# Altium PCB RX-Module-PCB.PcbDoc
Units mil, origin at the board's own origin, x right, y up, seen from the top; angles counter-clockwise.
Board outline 3503.94 x 2440.94 mil, 2 copper layers (Top Layer, Bottom Layer); 27 components, 37 nets, 107 pads, 17 vias.
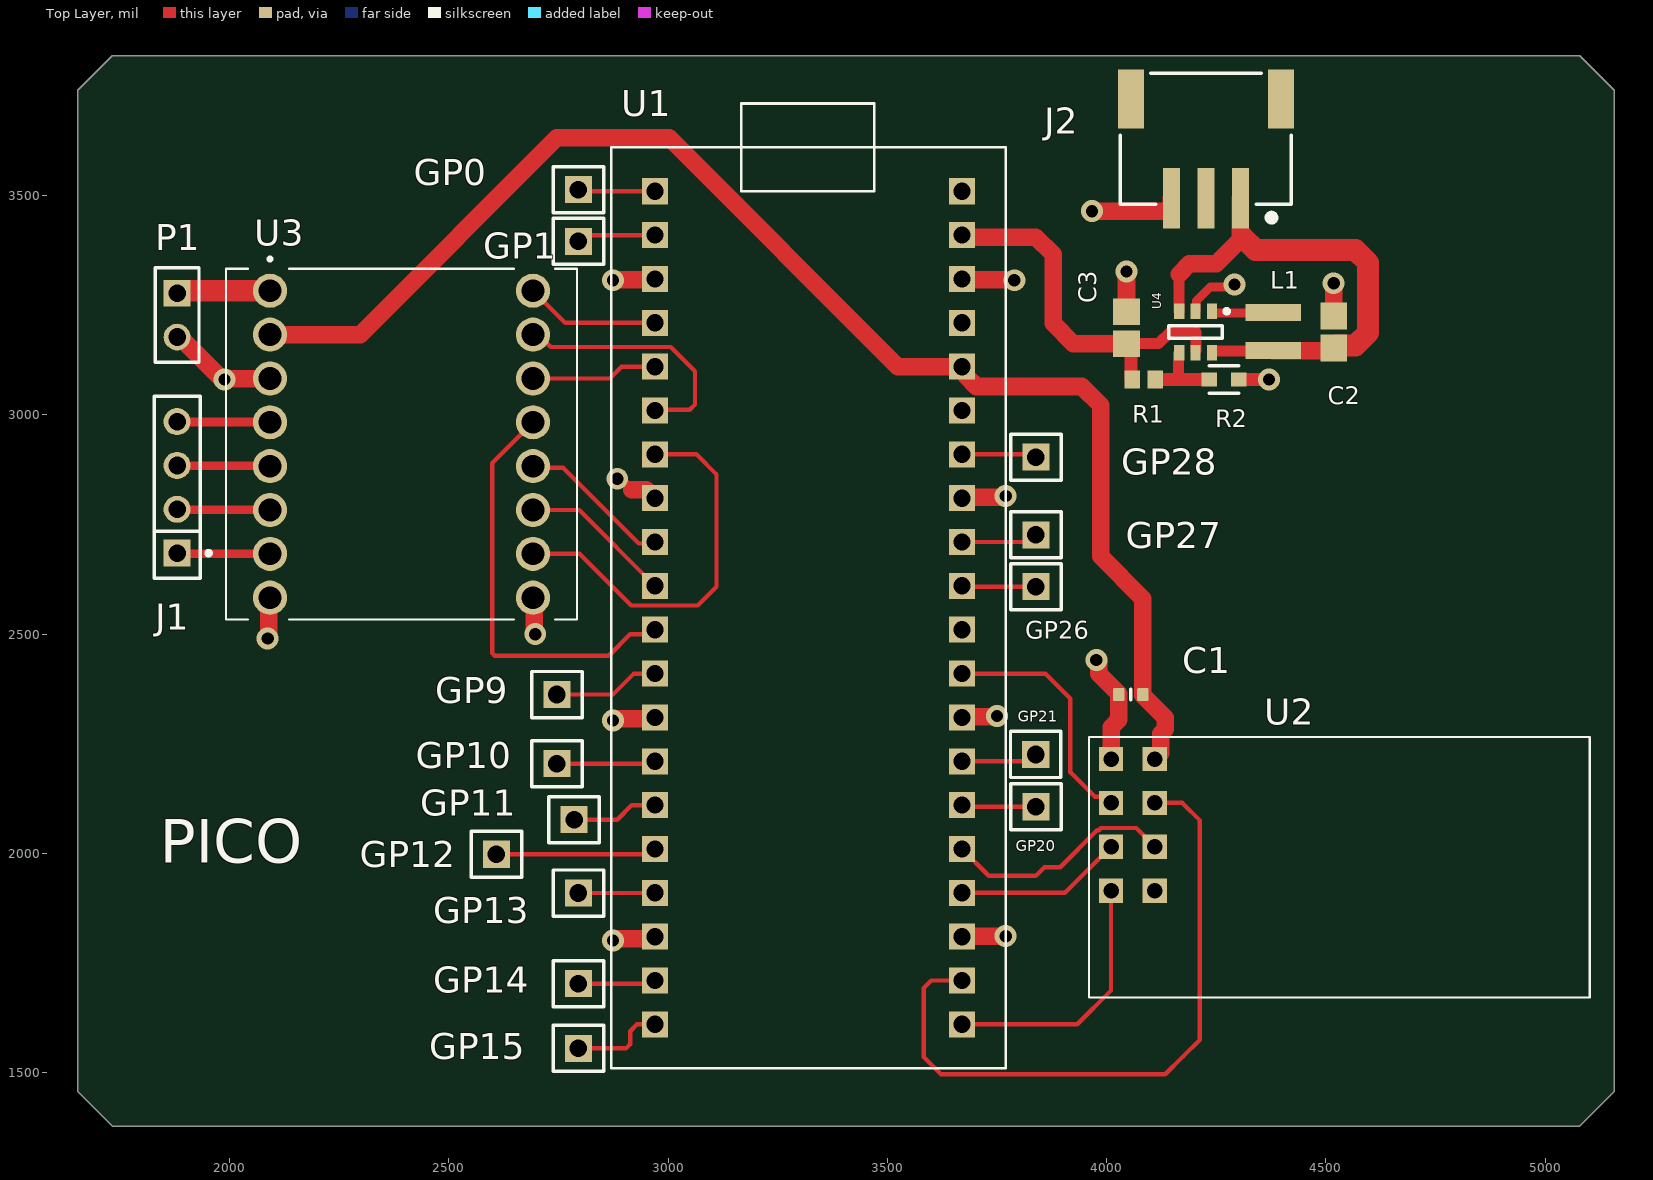
[diagram p0: Top Layer view]
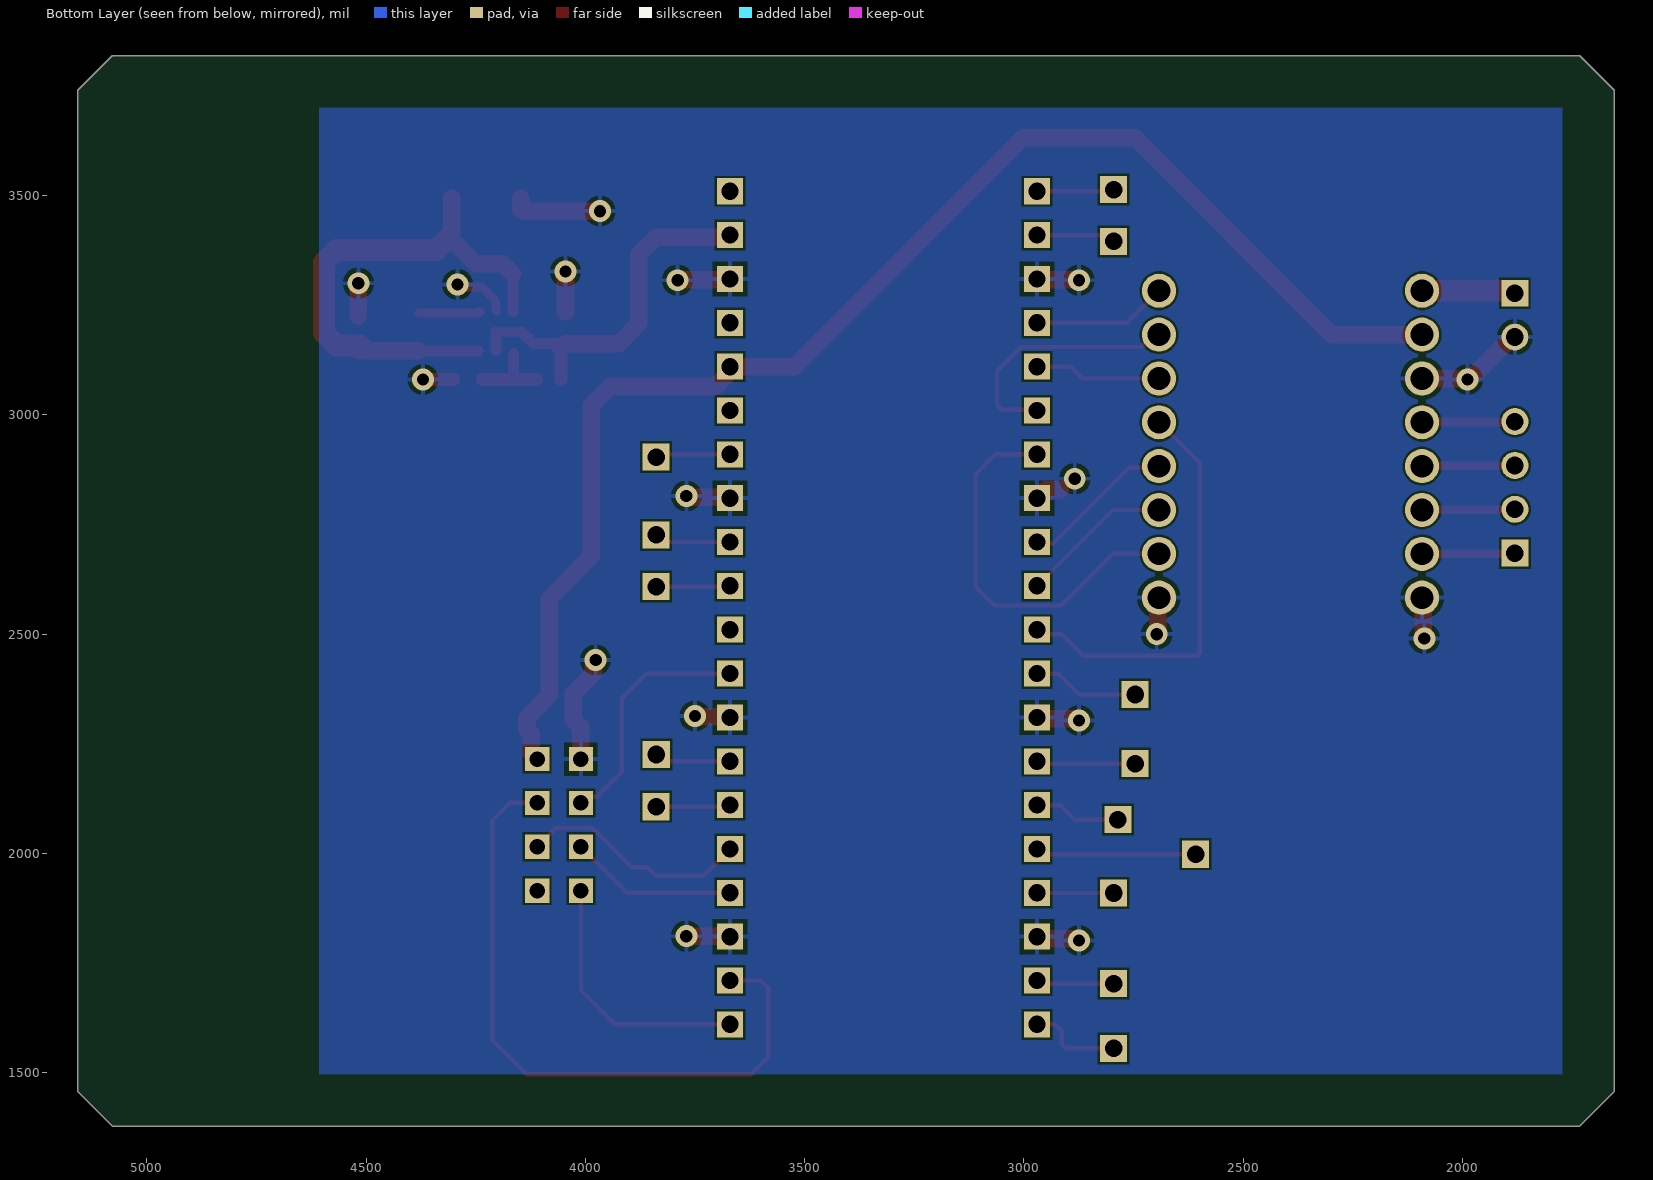
[diagram p1: Bottom Layer view, seen from below]
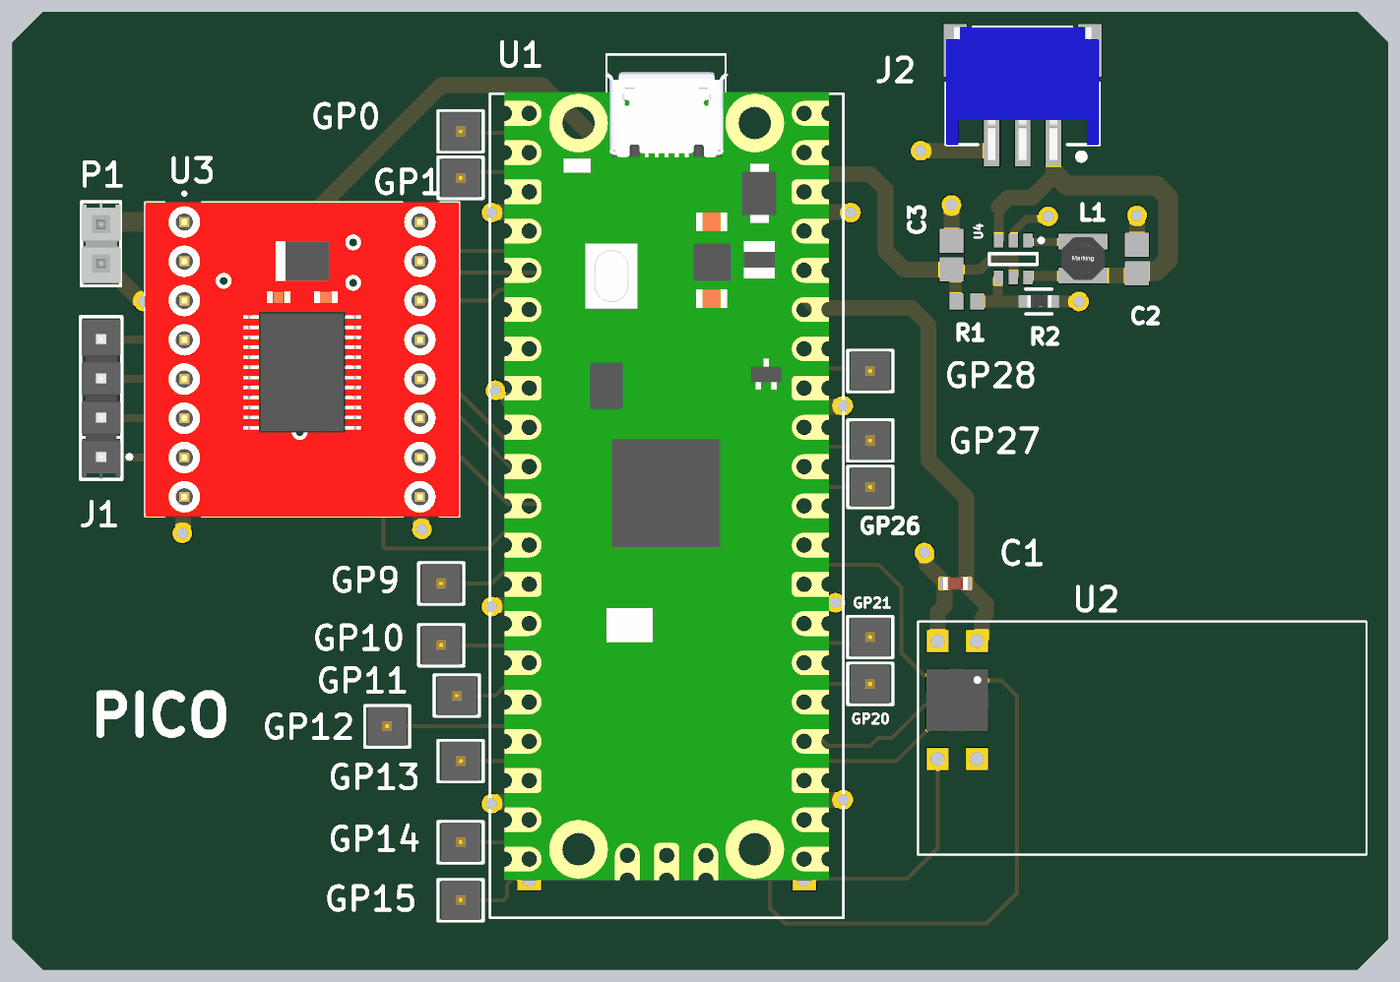
[diagram p2: 3D render of the assembled board from above, using the file's embedded part models]

## Layer stack, top to bottom
Top Solder: solder mask 0.4, Solder Resist, Dk 3.5
Top Layer: signal copper 1.4
Dielectric 1: dielectric 12.6, FR-4, Dk 4.8
Bottom Layer: signal copper 1.4
Bottom Solder: solder mask 0.4, Solder Resist, Dk 3.5

## Board outline
1653.54,1456.69 1732.28,1377.95 5078.74,1377.95 5157.48,1456.69 5157.48,3740.16 5078.74,3818.9 1732.28,3818.9 1653.54,3740.16

## Design rules (kind name [scope] priority, off if disabled: settings)
BoardOutlineClearance [All] p1: gap=10 ignorepadtopadclearanceinfootprint=FALSE
Clearance [All] p1: gap=5 ignorepadtopadclearanceinfootprint=FALSE
MinimumAnnularRing [All] p1: minimumring=6
PolygonConnect [All] p1: connectstyle=Relief reliefconductorwidth=10 reliefentries=4 polygonreliefangle="90 Angle" airgapwidth=10
RoutingVias [All] p1: holewidth=12 width=24 viastyle="Through Hole" minholewidth=12 minwidth=24 maxholewidth=12 maxwidth=24
SilkToSolderMaskClearance [IsPad] p1: minsilkscreentomaskgap=4 clearancetoexposedcopper=TRUE
SolderMaskExpansion [All] p1: expansion=3 istentingtop=FALSE
SupplyNets "Schematic Supply Nets_1" [InNet('GND')] p1: voltage=0.000
SupplyNets "Schematic Supply Nets" [InNet('3.3V')] p2: voltage=0.000
Width [All] p1: maxlimit=50 minlimit=8 preferedwidth=20
29 further rules are at their usual default settings.

## Components (designator, comment, footprint, x,y, rotation, side; value= is the part's Value field where it differs from the comment)
C1 "Capacitor 10µF +/-20% 10V 0603" CAPC0603(1608)100_L 4055.12,2362.2 r0 top value=10µF
C2 "0805YC475MAT2A" CAPC2013X152X50ML20T25 4517.72,3188.98 r270 top
C3 "0805YC475MAT2A" CAPC2013X152X50ML20T25 4045.28,3198.82 r90 top
GP0 "TSW-101-07-L-S" FP-TSW-101-07-L-S-MFG 2795.28,3513.78 r0 top (schematic designator J10)
GP1 "TSW-101-07-L-S" FP-TSW-101-07-L-S-MFG 2795.28,3395.67 r0 top (schematic designator J11)
GP9 "TSW-101-07-L-S" FP-TSW-101-07-L-S-MFG 2746.06,2362.2 r0 top (schematic designator J12)
GP10 "TSW-101-07-L-S" FP-TSW-101-07-L-S-MFG 2746.06,2204.72 r0 top (schematic designator J13)
GP11 "TSW-101-07-L-S" FP-TSW-101-07-L-S-MFG 2785.43,2076.77 r0 top (schematic designator J14)
GP12 "TSW-101-07-L-S" FP-TSW-101-07-L-S-MFG 2608.27,1998.03 r0 top (schematic designator J15)
GP13 "TSW-101-07-L-S" FP-TSW-101-07-L-S-MFG 2795.28,1909.45 r0 top (schematic designator J3)
GP14 "TSW-101-07-L-S" FP-TSW-101-07-L-S-MFG 2795.28,1702.76 r0 top (schematic designator J4)
GP15 "TSW-101-07-L-S" FP-TSW-101-07-L-S-MFG 2795.28,1555.12 r0 top (schematic designator J5)
GP20 "TSW-101-07-L-S" FP-TSW-101-07-L-S-MFG 3838.58,2106.3 r0 top (schematic designator J6)
GP21 "TSW-101-07-L-S" FP-TSW-101-07-L-S-MFG 3838.15,2225.5 r0 top (schematic designator J7)
GP26 "TSW-101-07-L-S" FP-TSW-101-07-L-S-MFG 3838.58,2608.27 r0 top (schematic designator J8)
GP27 "TSW-101-07-L-S" FP-TSW-101-07-L-S-MFG 3838.58,2726.38 r0 top (schematic designator J9)
GP28 "TSW-101-07-L-S" FP-TSW-101-07-L-S-MFG 3838.58,2903.54 r0 top (schematic designator J16)
J1 "TSW-104-23-T-S" FP-TSW-104-23-T-S-MFG 1879.92,2834.65 r90 top
J2 "S3B-PH-SM4-TB(LF)(SN)" JST-S3B-PH-SM4-TB-3_V 4226.38,3607.28 r180 top
L1 "744029004" WE-TPC_2813 4380,3190 r0 top
P1 "TSW-102-26-T-S" SMTC-TSW-102-26-XX-S 1879.92,3277.56 r270 top
R1 "CRCW0603976KFKTA" RESC1609X50X30ML10T20 4084.65,3080.71 r0 top
R2 "RT0603BRD07309KL" FP-RT0603-MFG 4267.72,3080.71 r0 top value=309KΩ
U1 "RASPBERRY_PI_PICO" RASPBERRY_PI_PICO 3320,2610 r0 top
U2 "NRF24L01+" NRF24L01-PCB-AERIAL 4060,2065 r270 top
U3 "ROB-14450" MODULE_ROB-14450 2391.73,2933.07 r0 top
U4 "MCP1640BT-I/CHY" MCHP-SOT-23-CHY6_L 4202.76,3188.98 r270 top

## Footprints (in the part's own frame and the unit in brackets; to place one, negate y for a bottom-side part, rotate by r counter-clockwise, add the part's x,y. Pads: shape width x height; smd on the part's side, far side on the other; paste and mask are expansions set on the pad)
CAPC0603(1608)100_L [mm] "Chip Capacitor, Body 1.6x0.8mm, Height 1.0mm, IPC High Density"
  rrect25% 0.66x0.76 smd: 1(-0.7,0) 2(0.7,0)
  silkscreen extent 0,-0.3 0,0.3, body extent -0.8,-0.4 0.8,0.4, height 0.95
CAPC2013X152X50ML20T25 [mm] "Chip Capacitor, 2-Leads, Body 2.01x1.25mm, IPC Low Density"
  rect 1.55x1.55 smd: 1(-0.925,0) 2(0.925,0)
  body extent -1.1,-0.72 1.11,0.72, height 1.52
FP-RT0603-MFG [mm]
  rect 0.9x0.8 smd paste+0 mask+0: 1(-0.85,0) 2(0.85,0)
  silkscreen extent -0.85,-0.81 0.86,0.8, body extent -1.4,-0.55 1.4,0.55, height 0.25
FP-TSW-101-07-L-S-MFG [mm]
  rect 1.57x1.57 hole 1.02 paste-2539.97 mask+0: 1(0,0)
  silkscreen extent -1.46,-1.34 1.46,1.34, body extent -1.56,-1.44 1.56,1.44, height 0.25
FP-TSW-104-23-T-S-MFG [mm]
  rect 1.57x1.57 hole 1.02 paste-2539.97 mask+0: 1(-3.81,0)
  round 1.57 hole 1.02 paste-2539.97 mask+0: 2(-1.27,0) 3(1.27,0) 4(3.81,0)
  silkscreen extent -5.27,-1.95 5.27,1.34, body extent -5.37,-1.44 5.37,1.44, height 0.25
JST-S3B-PH-SM4-TB-3_V [mm] "Header, 3-Leads, Body 9.9x7.6mm, Pitch 2mm, JST"
  rect 1x3.5 smd: 1(-2,2.875) 2(0,2.875) 3(2,2.875)
  rect 1.5x3.4 smd: NC1(-4.35,-2.875) NC2(4.35,-2.875)
  silkscreen extent -4.95,-4.37 4.95,4.2, body extent -4.95,-4.37 4.95,4.23, height 5.6
MCHP-SOT-23-CHY6_L [mm] "SOT23, 6-Leads, Body 2.9x1.55mm, Pitch 0.95mm, IPC High Density"
  rect 0.9x0.6 smd: 1(-1.2,0.95) 2(-1.2,0) 3(-1.2,-0.95) 4(1.2,-0.95) 5(1.2,0) 6(1.2,0.95)
  silkscreen extent -1.32,-1.55 0.35,1.93, body extent -0.9,-1.55 0.9,1.55, height 1.45
MODULE_ROB-14450 [mm]
  round 1.98 hole 1.32: 1(-7.62,8.89) 2(-7.62,6.35) 3(-7.62,3.81) 4(-7.62,1.27) 5(-7.62,-1.27) 6(-7.62,-3.81) 7(-7.62,-6.35) 8(-7.62,-8.89) 9(7.62,-8.89) 10(7.62,-6.35) 11(7.62,-3.81) 12(7.62,-1.27) 13(7.62,1.27) 14(7.62,3.81) 15(7.62,6.35) 16(7.62,8.89)
  silkscreen extent -10.16,-10.16 10.16,10.83, body extent -10.16,-10.16 10.16,10.16, height 5.5
NRF24L01-PCB-AERIAL [mm]
  rect 1.408x1.408 / inner round 1.408 / far side rect 1.408x1.408 hole 0.9: P$1(-3.81,-1.27) P$2(-3.81,1.27) P$3(-1.27,-1.27) P$4(-1.27,1.27) P$5(1.27,-1.27) P$6(1.27,1.27) P$7(3.81,-1.27) P$8(3.81,1.27)
  silkscreen extent -5.08,-2.54 10,26.46, body extent -2,-2 2,2, height 0.95
RASPBERRY_PI_PICO [mm]
  rect 1.508x1.508 / inner round 1.508 / far side rect 1.508x1.508 hole 1: 3V3(8.89,12.7) 3V3_EN(8.89,15.24) ADC_VREF(8.89,10.16) AGND(8.89,5.08) GND(8.89,17.78) GND2(8.89,-7.62) GND3(8.89,-20.32) GND4(-8.89,17.78) GND5(-8.89,5.08) GND6(-8.89,-7.62) GND7(-8.89,-20.32) GP0(-8.89,22.86) GP1(-8.89,20.32) GP2(-8.89,15.24) GP3(-8.89,12.7) GP4(-8.89,10.16) GP5(-8.89,7.62) GP6(-8.89,2.54) GP7(-8.89,0) GP8(-8.89,-2.54) GP9(-8.89,-5.08) GP10(-8.89,-10.16) GP11(-8.89,-12.7) GP12(-8.89,-15.24) GP13(-8.89,-17.78) GP14(-8.89,-22.86) GP15(-8.89,-25.4) GP16(8.89,-25.4) GP17(8.89,-22.86) GP18(8.89,-17.78) GP19(8.89,-15.24) GP20(8.89,-12.7) GP21(8.89,-10.16) GP22(8.89,-5.08) GP26_A0(8.89,0) GP27_A1(8.89,2.54) GP28_A2(8.89,7.62) RUN(8.89,-2.54) VBUS(8.89,22.86) VSYS(8.89,20.32)
  silkscreen extent -11.43,-27.94 11.43,27.94, body extent -10.5,-25.5 10.5,26.8, height 3.73
RESC1609X50X30ML10T20 [mm] "Chip Resistor, 2-Leads, Body 1.55x0.85mm, IPC Low Density"
  rect 0.9x1.05 smd: 1(-0.675,0) 2(0.675,0)
  body extent -0.82,-0.48 0.82,0.48, height 0.5
SMTC-TSW-102-26-XX-S [mm] ".025 SQ Post Terminal Strip Assembly, 1x2 Pins, Vertical, 2.54mm Pitch, Male"
  rect 1.55x1.55 hole 1.02: 1(0,0)
  round 1.55 hole 1.02: 2(2.54,0)
  silkscreen extent -1.46,-1.27 4,1.27, body extent -1.4,-1.27 3.81,1.27, height 8.38
WE-TPC_2813 [mm] "Power Inductor, SMD, 2-Leads, body 2.78x2.78mm"
  rect 3.2x1 smd: 1(0,1.1) 2(0,-1.1)
  body extent -1.39,-1.39 1.39,1.39, height 1.2

## Part data
C1: library part CMP-001-00075-4, "Chip Capacitor, 10µF +/-20%, 10V, 0603, Thickness 1 mm", Case/Package=0603, Max Operating Temperature=85°C, Min Operating Temperature=-55°C, Tolerance=10%, Voltage Rating=10V, Mounting Technology=SMT, Pins=2
C2 C3: library part CMP-2007-04519-1, Manufacturer="AVX Interconnect / Elco", Part Number=0805YC475MAT2A
GP0 GP1 GP9 GP10 GP11 GP12 GP13 GP14 GP15 GP20 GP21 GP26 GP27 GP28: library part CMP-02766-001775-1, "CONN HEADER VERT 1POS", Color=Black, Flammability Rating="UL94 V-0", Max Current Rating=7.6A, Max Operating Temperature=125°C, Max Voltage Rating (AC)=550V, Min Operating Temperature=-55°C, Connector Type=Header, Contact Finish - Mating=GOLD, Contact Material=Bronze, Contact Mating Length=0.23inch, Contact Plating=Gold, Contact Shape=Square, Contact Type="Male Pin", Depth=2.54mm, Fastening Type=Pull, Gender=Male, Housing Color=Black, Housing Material=Polyester, Insulation Color=Black, Insulation Material=PBT, Lead Free="Lead Free", Length=2.54mm, Mount="Through Hole", Number of Contacts=1, Number of Positions=1, Number of Rows=1, Orientation=Straight, Packaging=Bulk, Radiation Hardening=No, Reach SVHC Compliant=Yes, RoHS Compliant=Yes, Series=TSW, Termination=Solder, Width=2.54mm
J1: library part CMP-02766-001388-1, "CONN HEADER VERT 4POS 2.54MM", Color=Black, Max Current Rating=7.6A, Max Operating Temperature=105°C, Max Voltage Rating (AC)=550V, Min Operating Temperature=-55°C, Package Quantity=1, Connector Type="Male Pin", Contact Material=Bronze, Contact Mating Length=0.23inch, Contact Plating=Tin, Contact Type="Male Pin", Depth=2.54mm, Gender=Male, Housing Color=Black, Housing Material=Polyester, Lead Free="Lead Free", Length=10.16mm, Mount="Through Hole", Number of Contacts=4, Number of Positions=4, Number of Rows=1, Orientation=Straight, Packaging=Bulk, Pitch=2.54mm, Radiation Hardening=No, REACH SVHC="No SVHC", RoHS Compliant=Yes, Series=TSW, Termination=Solder, Width=2.54mm
J2: library part JST_S3B-PH-SM4-TB, "Conn., PCB to wire (battery), right angle, SMT, 2mm pitch, low profile, 2A per pin, 3Circuits", Manuf1=JST, Source1Partnumber=455-1750-1-ND, Source2Partnumber=455-1750-2-ND, ComponentLink1Description="Manufacturer Web", ComponentLink2Description="Datasheet Web", ComponentLink3Description="Digikey Web", LatestRevisionDate=23-October-2017, Manuf1Partnumber=S3B-PH-SM4-TB(LF)(SN), Populated=Yes, RoHS=Yes, Source1=Digikey, Source1Price=0.4929, Source1Qty=100, Source2=Digikey, Source2Price=0.26302, Source2Qty=10000
L1: library part CMP-0227-00069-3, Ambient Temperature Range High=85°C, Ambient Temperature Range Low=-40°C, Case/Package=Nonstandard, Current Rating=1A, DC Resistance (DCR)=170mΩ, Inductance=4.7µH, Inductance Tolerance=30%, Max DC Current=1.2A, Max Operating Temperature=125°C, Saturation Current=800mA, Self Resonant Frequency=65MHz, Series Resistance=200mΩ, Test Frequency=100kHz, Composition=Wirewound, Core Material=Ferrite, Depth=2.8mm, Height=1.35mm, Height - Seated (Max)=1.4986mm, Length=2.78mm, Min Operating Temperature=-40°C, Mount="Surface Mount", NexarPartId=22803201, Number of Pins=2, Packaging="Cut Tape (CT)", REACH SVHC=Unknown, Resistance=170mΩ, RMS Current (Irms)=1A, RoHS=Compliant, Shielding=Shielded, Termination=SMD/SMT, Tolerance=30%, Width=2.78mm
P1: library part CMP-1024-00328-1, "0.025\" SQ Post Header, Through-hole, Vertical, -55 to 105 degC, 2.54 mm Pitch, 2-Pin, Male, RoHS", Manufacturer=Samtec, Temperature Range="-55 to 105 degC", ComponentLink1Description="Manufacturer URL", ComponentLink1URL=http://www.samtec.com, ComponentLink2Description=Datasheet, ComponentLink2URL=http://www.samtec.com/documents/webfiles/pdf/TSW_TH.PDF, ComponentLink3Description="Package Specification", ComponentLink3URL=http://www.samtec.com/documents/webfiles/cpdf/TSW-XXX-XX-XXX-X-XX-XXX-MKT.pdf, DatasheetVersion=F-214, Mounting Technology=Through-hole, Orientation=Vertical, PackageDescription=".025[0.64] SQ. Post Terminal Strip Assembly", PackageReference=TSW-102-26-XX-S, PackageVersion="DM, 8/1988", PartNumber=TSW-102-26-T-S, Pitch="2.54 mm", RoHS=True
R1: library part CMP-2000-03648-1, Manufacturer="Vishay Dale", Part Number=CRCW0603976KFKTA
R2: library part CMP-03412-013429-1, "RES SMD 309K OHM 0.1% 1/10W 0603", Manufacturer=Yageo, Package=RT0603, Power Rating=0.1W, Resistance=309KΩ, Temperature="-55°C to +155°C", Temperature Coefficient="25 ppm/°C", Temperature Range High=+155°C, Temperature Range Low=-55°C, Tolerance=0.001, Voltage Rating=75V, Automotive=No, Category=Res, ComponentLink2Description=Datasheet, ComponentLink2URL=http://www.yageo.com/documents/recent/PYu-RT_1-to-0.01_RoHS_L_9.pdf, Composition="Thin Film", Device Class L1="Passive Components", Device Class L2=Resistors, Device Class L3="Chip SMD Resistors", Digikey Description="RES SMD 309K OHM 0.1% 1/10W 0603", Footprint Url=http://www.yageo.com/exep/pages/download/literatures/PYu-R_Mount_10.pdf, Height=0.55mm, Ipc Land Pattern Name=RESC16080X45, Lead Free=Yes, Manufacturer Part Number=RT0603BRD07309KL, Mouser Description="Thin Film Resistors - SMD 1/10W 309K ohm .1% 25ppm", Octopart=https://octopart.com/rt0603brd07309kl-yageo-1406771, RoHS=TRUE, Series=RT
U1: "Raspberry Pi Board, Arm Cortex-M0+; Core Architecture:Arm; Core Sub-Architecture:Cortex-M0+; Kit Contents:Raspberry Pi Pico Board; No. Of Bits:32Bit; Silicon Core Number:Rp2040; Silicon Manufacturer:Raspberry Pi", Package=None, Check_prices=https://www.snapeda.com/parts/RASPBERRY%20PI%20PICO/Raspberry+Pi/view-part/?ref=eda, MF="Raspberry Pi", MP="RASPBERRY PI PICO", SnapEDA_Link=https://www.snapeda.com/parts/RASPBERRY%20PI%20PICO/Raspberry+Pi/view-part/?ref=snap
U2: "IC RF TxRx Only General ISM > 1GHz 2.4GHz 20-VFQFN Exposed Pad", Package="QFN-20 Nordic Semiconductor", Check_prices=https://www.snapeda.com/parts/NRF24L01+/Nordic+Power/view-part/?ref=eda, MF="Nordic Semiconductor", MP=NRF24L01+, SnapEDA_Link=https://www.snapeda.com/parts/NRF24L01+/Nordic+Power/view-part/?ref=snap
U3: "TB6612FNG Motor Controller/Driver Power Management Evaluation Board", Package=None, Availability="In Stock", Check_prices=https://www.snapeda.com/parts/ROB-14450/SparkFun%20Electronics/view-part/2656367/?ref=eda, MF="SparkFun Electronics", MP=ROB-14450, Price=None, SnapEDA_Link=https://www.snapeda.com/parts/ROB-14450/SparkFun%20Electronics/view-part/2656367/?ref=snap
U4: library part CMP-0139-00285-1, "Start-up Synchronous Boost Regulator with True Output Disconnect or Input / Output Bypass Option, 350 mA, Input Voltage 0.65 to 5.5 V, Output Voltage 2.0 to 5.5 V, -40 to 85 degC, 6-pin SOT-23 (CHY6), Tape and Reel", Manufacturer=Microchip, ComponentLink1Description="Manufacturer URL", ComponentLink1URL=http://www.microchip.com, ComponentLink2Description=Datasheet, ComponentLink2URL=http://ww1.microchip.com/downloads/en/DeviceDoc/22234B.pdf, ComponentLink3Description="Package Specification", ComponentLink3URL=http://www.microchip.com/stellent/groups/techpub_sg/documents/packagingspec/en012702.pdf, ComponentLink4Description="Product URL", ComponentLink4URL=http://www.microchip.com/MCP1640, DatasheetVersion="Rev. B", Mounting Technology="Surface Mount", PackageDescription="6-Lead Plastic Small Outline Transistor, 2.9 x 1.55 mm Body, 0.95 mm Pitch", PackageReference=SOT-23-CHY6, PackageVersion=C04-028B, PartNumber=MCP1640BT-I/CHY

## Via types
v1: diameter 50, hole 28, Top Layer to Bottom Layer, 17 vias

## Nets (pads, with @x,y where several pads share a name; then routed paths per layer and width w, separated by ;. In a path a pad name is that pad's centre, name@x,y a point inside that pad or via, vN(x,y) a via of type N, cw(c..) or ccw(c..) an arc to the next point about the centre after c; other vN are vias at no path point)
3.3V: C1.2 U1.3V3 U2.P$2 U3.2 | length 3218
  Top Layer w40: U3.2 2297.24,3183.07 2746.06,3631.89 3001.97,3631.89 3523.86,3110 U1.3V3 3679.69,3100.31 3679.69,3088.12 3703.12,3064.69 3943.19,3064.69 3986.22,3021.65 3986.22,2677.17 4082.68,2580.71 4082.68,2360.24 4133.86,2309.06 4133.86,2283.46 4123.11,2272.72 4123.11,2228.11 U2.P$2
6V: P1.1 U3.1 | length 214.1
  Top Layer w50: P1.1 1885.43,3283.07 U3.1
FB-BST: R1.2 R2.1 U4.4 | length 182.1
  Top Layer w25: 4163.39,3080.71 U4.4@4163.39,3139.76
  Top Layer w30: R1.2 4163.39,3080.71 R2.1
GND: C1.1 C2.1 C3.2 J2.3 P1.2 R2.2 U1.AGND U1.GND U1.GND2 U1.GND3 U1.GND4 U1.GND5 U1.GND6 U1.GND7 U2.P$1 U3.3 U3.8 U3.9 U4.2 | length 2059
  Top Layer w20: v1(2086.61,2490.16) v1@2089.17,2492.72 ; U3.8@2089.17,2580.51 U3.8 ; U3.9 U3.9@2694.29,2580.51 ; v1@2694.29,2502.56 v1(2696.85,2500) ; v1(2874.02,1801.18) v1@2878.43,1805.59 ; v1(2874.02,2303.15) v1@2877.44,2306.57 ; v1(2874.02,3307.09) v1@2875.47,3308.54 ; v1(2883.86,2854.33) 2891.98,2854.33 2916.62,2829.69 ; U1.GND5@2950.31,2829.69 U1.GND5 ; U1.GND7@2965.59,1805.59 U1.GND7 ; U1.GND6@2966.57,2306.57 U1.GND6 ; U1.GND4@2968.54,3308.54 U1.GND4 ; U1.GND3 U1.GND3@3670.51,1810.51 ; U1.GND2 U1.GND2@3671.5,2311.5 ; U1.AGND U1.AGND@3672.48,2812.48 ; U1.GND U1.GND@3671.46,3308.54 ; v1@3748.5,2311.5 v1(3750,2312.99) ; v1@3767.2,2812.48 v1(3769.68,2814.96) ; v1@3769.17,1810.51 v1(3769.68,1811.02) ; v1@3787.91,3308.54 v1(3789.37,3307.09) ; U4.2 4204.57,3238.03 4204.57,3259.68 4236.39,3291.5 4285.6,3291.5 v1(4291.34,3297.24)
  Top Layer w30: R2.2 v1(4370.08,3080.71)
  Top Layer w40: P1.2 1885.63,3177.56 1982.48,3080.71 v1(1988.19,3080.71) ; v1@1989.37,3081.89 2090.55,3081.89 U3.3 ; v1@2089.17,2492.72 U3.8@2089.17,2580.51 ; v1@2694.29,2502.56 U3.9@2694.29,2580.51 ; v1@2875.47,3308.54 U1.GND4@2968.54,3308.54 ; v1@2877.44,2306.57 U1.GND6@2966.57,2306.57 ; v1@2878.43,1805.59 U1.GND7@2965.59,1805.59 ; 2916.62,2829.69 U1.GND5@2950.31,2829.69 ; U1.GND3@3670.51,1810.51 v1@3769.17,1810.51 ; U1.GND@3671.46,3308.54 v1@3787.91,3308.54 ; U1.GND2@3671.5,2311.5 v1@3748.5,2311.5 ; U1.AGND@3672.48,2812.48 v1@3767.2,2812.48 ; v1(3966.54,3464.57) 4142.32,3464.57 4147.64,3469.88 J2.3 ; v1(3976.38,2440.94) 3982.12,2435.2 3982.12,2409.61 4027.56,2364.17 C1.1 4027.56,2305.26 4010,2287.7 U2.P$1 ; C3.2 v1(4045.28,3326.77) ; C2.1 v1(4517.72,3300.2)
GP0: GP0.1 U1.GP0 | length 176.3
  Top Layer w10: GP0.1 2799.06,3510 U1.GP0
GP1: GP1.1 U1.GP1 | length 180.7
  Top Layer w10: GP1.1 2809.61,3410 U1.GP1
GP9: GP9.1 U1.GP9 | length 243.7
  Top Layer w10: GP9.1 2874.02,2362.2 2921.81,2410 U1.GP9
GP10: GP10.1 U1.GP10 | length 226.1
  Top Layer w10: GP10.1 2964.72,2204.72 U1.GP10
GP11: GP11.1 U1.GP11 | length 198.3
  Top Layer w10: GP11.1 2883.86,2076.77 2917.09,2110 U1.GP11
GP12: GP12.1 U1.GP12 | length 366.7
  Top Layer w10: GP12.1 2958.03,1998.03 U1.GP12
GP13: GP13.1 U1.GP13 | length 175
  Top Layer w10: GP13.1 2969.45,1909.45 U1.GP13
GP14: GP14.1 U1.GP14 | length 177.7
  Top Layer w10: GP14.1 2962.76,1702.76 U1.GP14
GP15: GP15.1 U1.GP15 | length 214.8
  Top Layer w10: GP15.1 2903.54,1555.12 2913.39,1564.96 2913.39,1594.49 2928.9,1610 U1.GP15
GP20: GP20.1 U1.GP20 | length 170.1
  Top Layer w10: U1.GP20 3673.7,2106.3 GP20.1
GP21: GP21.1 U1.GP21 | length 174.6
  Top Layer w10: U1.GP21 3822.66,2210 GP21.1
GP26: GP26.1 U1.GP26_A0 | length 169.3
  Top Layer w10: U1.GP26_A0 3671.73,2608.27 GP26.1
GP27: GP27.1 U1.GP27_A1 | length 175.4
  Top Layer w10: U1.GP27_A1 3822.2,2710 GP27.1
GP28: GP28.1 U1.GP28_A2 | length 171.3
  Top Layer w10: U1.GP28_A2 3832.13,2910 GP28.1
MD-AI-1: U1.GP3 U3.14 | length 289.4
  Top Layer w10: U3.14 2866.54,3083.07 2893.46,3110 U1.GP3
MD-AI-2: U1.GP4 U3.15 | length 576.5
  Top Layer w10: U3.15 2704.04,3183.07 2732.42,3154.69 3005.9,3154.69 3061.02,3099.56 3061.02,3023.53 3049.31,3011.81 2971.81,3011.81 U1.GP4
MD-BI-1: U1.GP6 U3.12 | length 352.7
  Top Layer w10: U3.12 2695.75,2879.06 2760.71,2879.06 2933.07,2706.69 2966.69,2706.69 U1.GP6
MD-BI-2: U1.GP7 U3.11 | length 350
  Top Layer w10: U3.11 2796.93,2783.07 U1.GP7
MD-PWM-A: U1.GP2 U3.16 | length 308.5
  Top Layer w10: U3.16 2764.8,3210 U1.GP2
MD-PWM-B: U1.GP5 U3.10 | length 900.2
  Top Layer w10: U3.10 2797.78,2683.07 2915.53,2565.31 3067.28,2565.31 3110.24,2608.27 3110.24,2864.17 3064.41,2910 U1.GP5
MD-STBY: U1.GP8 U3.13 | length 963.6
  Top Layer w10: U3.13 2598.43,2889.76 2598.43,2456.65 2604.28,2450.79 2864.17,2450.79 2913.39,2500 2960,2500 U1.GP8
Motor1_01: J1.4 U3.4 | length 212.5
  Top Layer w20: J1.4 1880.71,2983.86 2090.94,2983.86 U3.4
Motor1_02: J1.3 U3.5 | length 212.5
  Top Layer w20: J1.3 1880.71,2883.86 2090.94,2883.86 U3.5
Motor2_01: J1.1 U3.7 | length 212.5
  Top Layer w20: J1.1 1881.5,2683.07 U3.7
Motor2_02: J1.2 U3.6 | length 212.5
  Top Layer w20: J1.2 1880.71,2783.86 2090.94,2783.86 U3.6
RXTX_CE: U1.GP22 U2.P$3 | length 560.2
  Top Layer w10: U1.GP22 3859.69,2410 3917.32,2352.36 3917.32,2185.04 3973.14,2129.22 3995.78,2129.22 U2.P$3
RXTX_CSN: U1.GP17 U2.P$4 | length 1550
  Top Layer w10: U1.GP17 3599.76,1710 3582.68,1692.91 3582.68,1535.43 3622.05,1496.06 4133.86,1496.06 4173.23,1535.43 4212.6,1574.8 4212.6,2074.9 4172.5,2115 U2.P$4
RXTX_MISO: U1.GP16 U2.P$7 | length 599.8
  Top Layer w10: U1.GP16 3932.83,1610 4010,1687.17 U2.P$7
RXTX_MOSI: U1.GP19 U2.P$6 | length 528.1
  Top Layer w10: U1.GP19 3731.18,1948.82 3838.58,1948.82 3858.27,1968.5 3893.93,1968.5 3978.14,2052.72 3981.85,2052.72 3986.85,2057.72 4067.28,2057.72 U2.P$6
RXTX_SCK: U1.GP18 U2.P$5 | length 383.5
  Top Layer w10: U1.GP18 3905,1910 U2.P$5
SW-BST: L1.1 U4.1 | length 142.6
  Top Layer w20: U4.1 4240.16,3234.09 4241.97,3232.28 L1.1@4379.92,3232.28
VBOOST: C3.1 R1.1 U1.VSYS U4.5 | length 866.7
  Top Layer w20: 4145.13,3188.98 4203.44,3188.98
  Top Layer w25: C3.1 4118.56,3162.4 4145.13,3188.98 ; U4.5@4203.44,3146.95 4203.44,3188.98
  Top Layer w30: R1.1@4055.79,3081.38 C3.1@4055.79,3151.89
  Top Layer w40: U1.VSYS 3674.49,3405.51 3838.58,3405.51 3877.95,3366.14 3877.95,3208.66 3924.21,3162.4 C3.1 C3.1@4055.79,3151.89
VIN: C2.2 J2.1 L1.2 U4.3 U4.6 | length 1183.9
  Top Layer w25: U4.3 4165.35,3321.06 ; U4.6@4244.09,3145.67 L1.2@4379.92,3145.67
  Top Layer w40: 4165.35,3321.06 4188.79,3344.49 4249.65,3344.49 4310.43,3405.27 ; 4305.12,3399.96 J2.1 ; L1.2 C2.2@4507.2,3146.69
  Top Layer w50: 4310.43,3405.27 4339.72,3375.98 4567.17,3375.98 4596.46,3346.69 4596.46,3187.36 4567.17,3158.07 C2.2@4522.64,3158.07 ; C2.2@4513.23,3157.05 C2.2
pads on no net: J2.2 J2.NC1 J2.NC2 U1.3V3_EN U1.ADC_VREF U1.RUN U1.VBUS U2.P$8

## Polygon pours and split planes (outlines as drawn)
GND on Bottom Layer "GND_L02_P000" (solid, pour order 0): 1771.65,3700.79 4606.3,3700.79 4606.3,1496.06 1771.65,1496.06

## Silkscreen, mask and mechanical layers (free items; w line width, h text height)
Mechanical 1:
  lines w10: 1653.54,1456.69 1732.28,1377.95 5078.74,1377.95 5098.43,1397.64 5137.8,1437.01 5157.48,1456.69 5157.48,3740.16 5078.74,3818.9 1771.65,3818.9 1732.28,3818.9 1653.54,3740.16 1653.54,3700.79 1653.54,1456.69

## Text inside footprints (layer, text, board x,y; h text height)
U1: Top Overlay "PICO" at 1840.55,1978.35 h100